# Altium PCB DDS.PcbDoc (part 2 of 2)
Units mm, origin at the board's own origin, x right, y up, seen from the top; angles counter-clockwise.
Board outline 60 x 140 mm, 4 copper layers (Top Layer, GND, Supply, Bottom Layer), stack 0.778 mm thick; 241 components, 138 nets, 781 pads, 160 vias.
Unrouted connection lines stored in the file: 258.
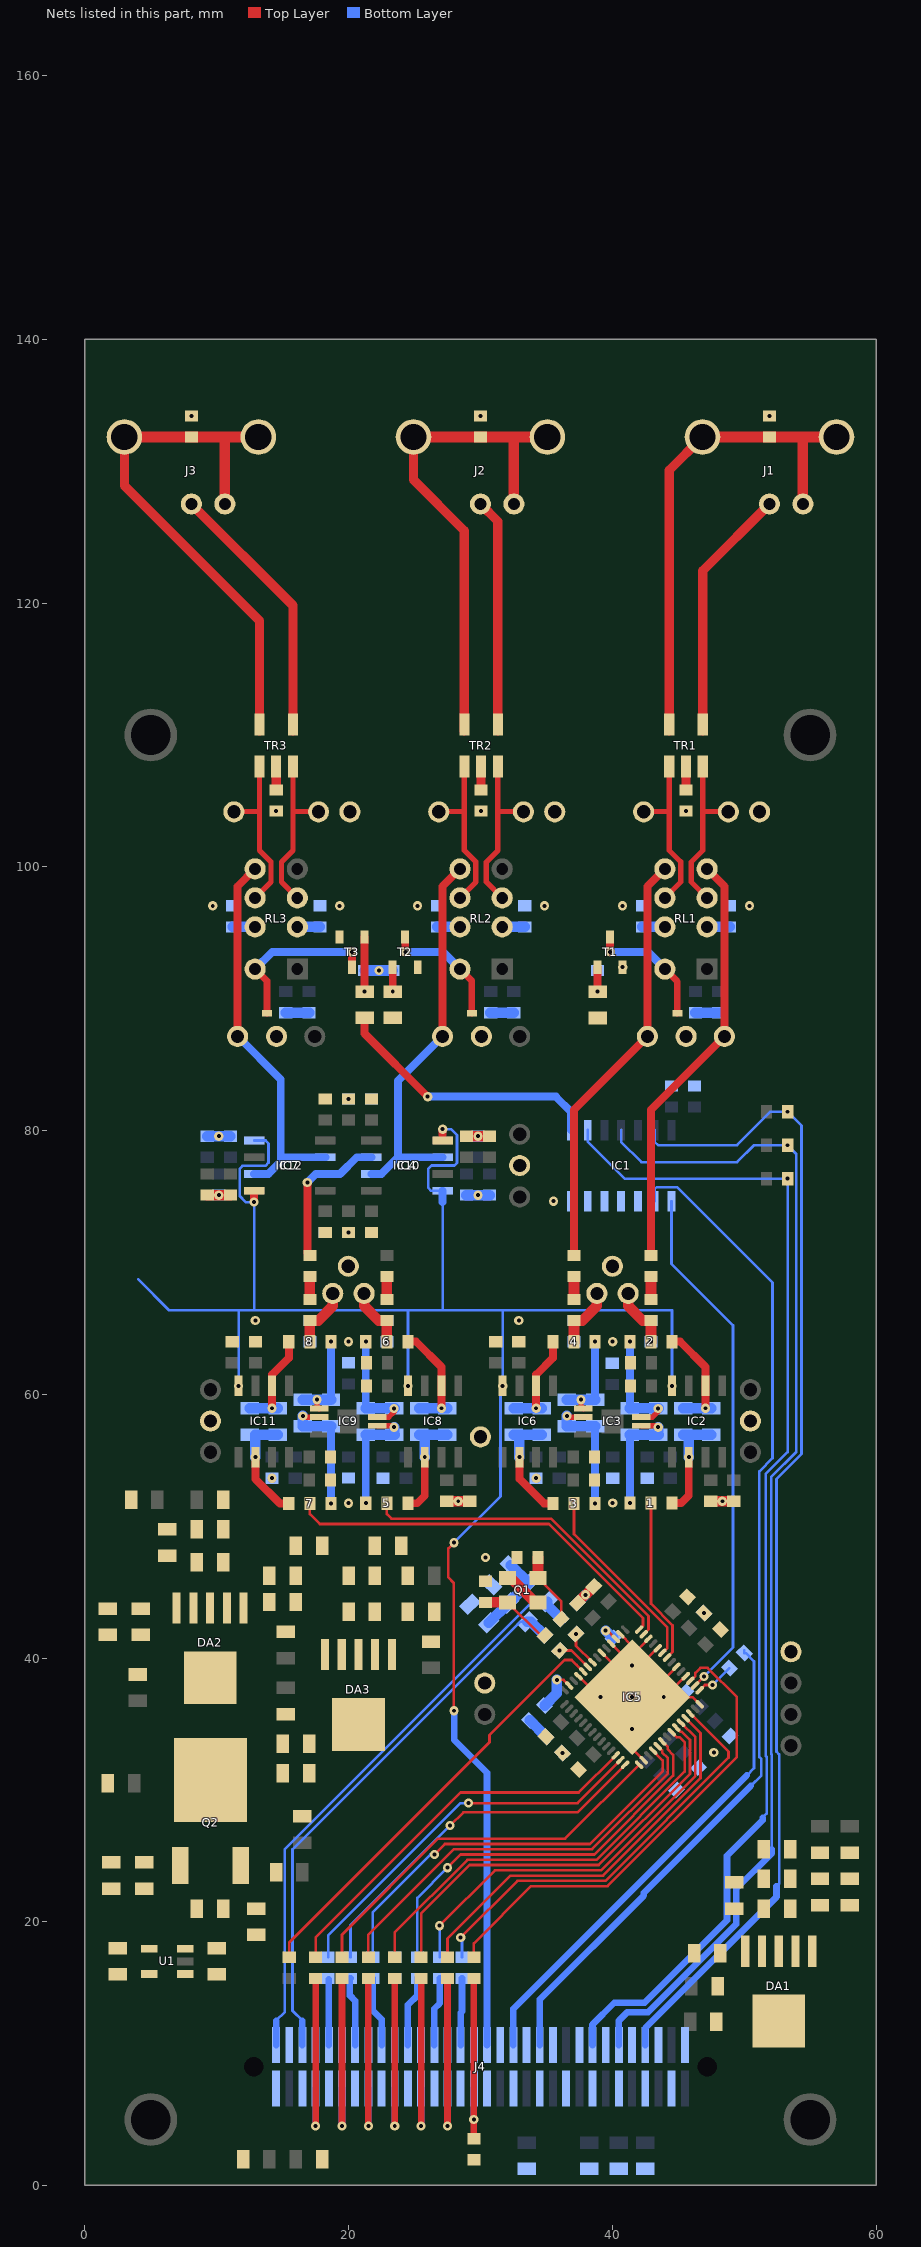
[diagram p4: the nets of this part, all layers, seen from the top]

## Via types
v1: diameter 0.7, hole 0.3, Top Layer to Bottom Layer, 91 vias
v2: diameter 0.7, hole 0.3, Top Layer to Bottom Layer, tented both sides, 63 vias
v3: diameter 1.27, hole 0.711, Top Layer to Bottom Layer, 5 vias
v4: diameter 1, hole 0.5, Top Layer to Bottom Layer, 1 vias

## Nets (pads, with @x,y where several pads share a name; then routed paths per layer and width w, separated by ;. In a path a pad name is that pad's centre, name@x,y a point inside that pad or via, vN(x,y) a via of type N, cw(c..) or ccw(c..) an arc to the next point about the centre after c; other vN are vias at no path point) (continued)
GND: C1.2 C2.2 C3.2 C4.2 C5.2 C6.2 C7.2 C8.2 C9.2 C10.2 C11.2 C12.2 C13.2 C14.2 C15.2 C16.2 C17.2 C18.2 C19.2 C20.2 C21.2 C22.2 C23.2 C24.2 C25.2 C26.2 C27.2 C28.2 C29.2 C30.2 C31.2 C32.1 C33.1 C34.1 C35.1 C36.1 C37.1 C38.1 C39.1 C40.1 C41.1 C42.1 C43.1 C44.1 C45.1 C46.1 C47.1 C48.1 C49.1 C50.1 C51.1 C52.1 C53.1 C54.1 C55.1 C56.1 C57.1 C58.1 C59.1 C60.1 C61.1 C62.1 C63.1 C64.1 C65.1 C69.1 C71.2 C78.1 C80.2 C83.2 C84.2 C86.2 C88.1 C89.1 C90.1 C91.1 C92.1 C93.1 C94.1 C95.1 C96.1 C97.1 C98.1 C99.1 C100.1 C101.1 C103.1 C104.1 C105.1 C106.1 C107.1 C108.1 C110.1 C111.1 C112.1 C113.1 C114.1 C115.1 C117.1 C118.1 DA1.3 DA1.6 DA2.3 DA2.6 DA3.3 DA3.6 IC1.7 IC5.4 IC5.6 IC5.10 IC5.12 IC5.16 IC5.18 IC5.20 IC5.25 IC5.44 IC5.56 IC5.57 J4.1 J4.4 J4.5 J4.8 J4.9 J4.12 J4.13 J4.16 J4.17 J4.20 J4.21 J4.24 J4.25 J4.28 J4.29 J4.32 J4.33 J4.36 J4.37 J4.40 J4.41 J4.44 J4.45 J4.48 J4.49 J4.52 J4.53 J4.56 J4.57 J4.60 J4.61 J4.64 pad.@9.525,57.975 pad.@14.536,87.147 pad.@19.979,69.711 pad.@20.097,104.175 pad.@30,56.775 pad.@30.075,87.147 pad.@30.325,38.1 pad.@32.975,77.35 pad.@35.636,104.175 pad.@40.009,69.711 pad.@45.6,87.147 pad.@50.475,57.975 pad.@51.175,104.175 pad.@53.55,40.475 Q1.2 Q1.4 R3.2 R4.1 R7.1 R9.1 R10.1 R12.1 R25.1 R30.1 R31.1 R35.1 R36.2 R41.1 R42.1 R43.1 R44.1 R45.1 R47.1 R48.1 R49.1 R60.1 R61.1 R62.1 R64.2 R67.1 R69.1 R71.1 R73.1 T1.2 T2.2 T3.2 U1.1 | length 59.6
  Top Layer w0.2: IC5.25@37.434,38.623 39.025,37.032 v1(41.5,37.032) ; IC5.20@39.202,40.391 IC5.57@41.5,38.093 ; IC5.18@39.909,41.098 IC5.57@41.5,39.507 ; IC5.16@40.616,41.805 41.5,40.921 IC5.57@41.5,40.214 ; IC5.44@42.384,32.259 41.5,33.143 v1(41.5,37.032) ; IC5.12@42.737,41.451 IC5.57@41.5,40.214 ; IC5.10@43.445,40.744 IC5.57@41.5,38.8 ; IC5.6@44.859,39.33 IC5.57@42.561,37.032 ; IC5.4@45.566,38.623 43.98,37.037 v1(43.9,37.037) ; IC5.56@46.627,36.502 46.091,37.037 v1(43.9,37.037) ; v1(41.5,37.032) IC5.57@41.5,38.093 ; v1(41.5,37.032) IC5.57@42.561,37.032 ; IC5.57@41.5,38.093 IC5.57@41.5,38.8 ; IC5.57@41.5,38.8 IC5.57@41.5,39.507 ; IC5.57@41.5,39.507 IC5.57@41.5,40.214 ; IC5.57@42.561,37.032 42.566,37.037 v1(43.9,37.037)
  Top Layer w0.8: C41.1@9.285,75.105 v1(10.16,75.105) C25.2@11.035,75.105 ; C38.1@27.44,51.89 C22.2@29.19,51.89 ; C40.1@28.935,79.575 v1(29.81,79.575) C24.2@30.685,79.575 ; Q1.4@32.065,46.072 32.29,46.072 34.14,44.222 Q1.2@34.365,44.222 ; C2.2@37.356,44.181 C1.2@38.593,45.418 ; C36.1@47.465,51.89 C20.2@49.215,51.89
  Bottom Layer w0.8: C43.1@9.285,79.575 v2(10.16,79.575) C27.2@11.035,79.575 ; C56.1@15.236,88.94 15.246,88.95 17.001,88.95 C14.2@17.011,88.94 ; R62.1@21.211,92.14 v2(22.3,92.14) R61.1@23.35,92.14 ; C42.1@28.935,75.105 v2(29.81,75.105) C26.2@30.685,75.105 ; C55.1@30.76,88.93 30.77,88.94 C13.2@32.525,88.94 C13.2@32.535,88.93 ; C48.1@37.356,44.181 v2(37.969,44.793) ; C54.1@46.299,88.93 46.309,88.94 C12.2@48.064,88.94 C12.2@48.074,88.93
  other v1: 36.206,32.793 41.505,34.632 39.1,37.027 41.495,39.432 46.954,43.406 14.2,53.64 34.225,53.64 19.985,72.28 19.985,82.4 40.789,92.39 14.511,104.24 30.05,104.24 45.589,104.24 8.08,134.2 30,134.2 51.92,134.2
  other v2: 47.7,32.825 30.389,47.623 20,51.74 40.03,51.753 28.315,51.89 48.34,51.89 20,63.99 40.03,63.99 12.93,65.59 32.91,65.59 35.55,74.65 9.697,97.05 19.325,97.05 25.236,97.05 34.864,97.05 40.775,97.05 50.403,97.05
I/O_UPDATE: J4.18 R15.1 R41.2 | length 5.3
  Bottom Layer w0.5: R15.1@21.833,15.7 21.833,13.267 22.5,12.6 J4.18@22.5,10.65
IN0+_D: 1.3 C73.1 IC3.6 R20.1 | length 9.2
  Top Layer w0.4: IC3.6@42.21,57.615 43.375,57.615 v1(43.483,57.508)
  Bottom Layer w0.6: v1(41.334,51.753) C73.1@41.334,56.93
  Bottom Layer w0.8: C73.1@41.334,56.943 43.473,56.943 R20.1@43.48,56.95 ; R20.1@43.483,56.95 v1(43.483,57.508) ; R20.1@43.508,56.94 R20.1@43.518,56.93
IN0+_S: 1.1 C66.1 IC2.2 R1.1 | length 8.3
  Top Layer w0.6: 1.1@44.534,51.753 45.23,51.753 45.8,52.323 v1(45.8,55.24) ; IC2.2@45.795,55.243 IC2.2@45.805,55.253
  Bottom Layer w0.8: C66.1@45.365,56.943 R1.1@47.504,56.943 ; v1(45.8,55.24) C66.1@45.8,56.938
IN0-_D: 3.3 C67.1 IC3.2 R2.1 | length 10.1
  Top Layer w0.4: v1(36.557,58.365) 36.657,58.265 IC3.2@37.815,58.265
  Bottom Layer w0.6: v1(38.696,51.715) R2.1@38.696,57.58
  Bottom Layer w0.8: v1(36.557,58.365) 36.557,57.593 R2.1@38.693,57.593
IN0-_S: 3.1 C72.1 IC6.2 R19.1 | length 8.8
  Top Layer w0.6: v1(32.955,55.24) 32.955,53.59 34.83,51.715 3.1@35.496,51.715
  Bottom Layer w0.8: C72.1@32.517,56.943 R19.1@34.656,56.943 ; v1(32.955,55.24) C72.1@32.955,56.938
IN1+_D: 5.3 C82.1 IC9.6 R51.1 | length 9.2
  Top Layer w0.4: IC9.6@22.185,57.615 23.345,57.615 v1(23.453,57.508)
  Bottom Layer w0.6: v1(21.304,51.74) C82.1@21.304,56.93
  Bottom Layer w0.8: C82.1@21.304,56.943 23.443,56.943 R51.1@23.45,56.95 ; R51.1@23.453,56.95 v1(23.453,57.508) ; R51.1@23.478,56.94 R51.1@23.488,56.93
IN1+_S: 5.1 C74.1 IC8.2 R32.1 | length 8.3
  Top Layer w0.6: 5.1@24.504,51.74 25.2,51.74 25.775,52.315 v1(25.775,55.24) IC8.2@25.765,55.23
  Bottom Layer w0.8: C74.1@25.342,56.943 R32.1@27.481,56.943 ; v1(25.775,55.24) C74.1@25.775,56.938
IN1-_D: 7.3 C75.1 IC9.2 R33.1 | length 10.1
  Top Layer w0.4: v1(16.527,58.365) 16.627,58.265 IC9.2@17.785,58.265
  Bottom Layer w0.6: v1(18.666,51.715) R33.1@18.666,57.59
  Bottom Layer w0.8: v1(16.527,58.365) 16.527,57.593 R33.1@18.666,57.593
IN1-_S: 7.1 C81.1 IC11.2 R50.1 | length 8.4
  Top Layer w0.6: v1(12.93,55.24) 12.93,53.585 14.8,51.715 7.1@15.466,51.715
  Bottom Layer w0.2: C81.1@12.925,56.943 C81.1@12.93,56.938
  Bottom Layer w0.8: C81.1@12.925,56.943 R50.1@14.626,56.943 ; v1(12.93,55.24) C81.1@12.93,56.938
MASTER_RST: J4.31 R14.1 R42.2 | length 14.5
  Top Layer w0.5: R42.2@29.5,3.55 v1(29.5,5) R14.1@29.5,15.7
  Bottom Layer w0.5: v1(29.5,5) J4.31@29.5,7.35
Net1_2: 1.2 IC5.8 | length 12.6
  Top Layer w0.2: 1.2@42.934,51.753 42.934,44.119 44.57,42.483 44.57,40.456 IC5.8@44.152,40.037
Net2_2: 2.2 pad.@41.205,67.65 R3.1 R5.1 | length 4.7
  Top Layer w0.8: pad.@41.205,67.65 41.205,66.7 42.315,65.59 R5.1@42.934,65.59 v1(42.934,63.99)
Net3_2: 3.2 IC5.9 | length 14.4
  Top Layer w0.2: 3.2@37.096,51.715 37.096,49.391 44.17,42.317 44.17,40.763 IC5.9@43.798,40.391
Net4_2: 4.2 pad.@38.83,67.65 R8.1 R12.2 | length 4.7
  Top Layer w0.8: v1(37.096,63.99) R8.1@37.096,65.59 37.72,65.59 38.83,66.7 pad.@38.83,67.65
Net5_2: 5.2 IC5.13 | length 25.5
  Top Layer w0.2: 5.2@22.904,51.74 22.904,50.911 23.25,50.565 35.356,50.565 42.75,43.171 42.75,42.171 IC5.13@42.384,41.805 IC5.13@42.384,41.876
Net6_2: 6.2 pad.@21.175,67.65 R36.1 R37.1 | length 4.7
  Top Layer w0.8: pad.@21.175,67.65 21.175,66.7 22.285,65.59 R37.1@22.904,65.59 v1(22.904,63.99)
Net7_2: 7.2 IC5.14 | length 30.3
  Top Layer w0.2: 7.2@17.066,51.715 17.066,50.924 17.825,50.165 35.191,50.165 42.325,43.031 42.325,42.453 IC5.14@42.03,42.159
Net8_2: 8.2 pad.@18.8,67.65 R40.1 R45.2 | length 4.7
  Top Layer w0.8: v1(17.066,63.99) R40.1@17.066,65.59 17.69,65.59 18.8,66.7 pad.@18.8,67.65
NetC68_1: C68.1 R5.2 | length 1.7
  Top Layer w0.8: R5.2@42.934,67.19 C68.1@42.934,68.93
NetC68_2: C68.2 pad.@48.5,87.147 RL1.4 | length 32.2
  Top Layer w0.6: C68.2@42.934,70.53 42.934,81.581 pad.@48.5,87.147 48.514,87.161 48.514,98.525 RL1.4@47.189,99.85
NetC70_1: C70.1 R8.2 | length 1.7
  Top Layer w0.8: R8.2@37.096,67.19 C70.1@37.096,68.93
NetC70_2: C70.2 pad.@42.664,87.147 RL1.5 | length 32.2
  Top Layer w0.6: C70.2@37.096,70.53 37.096,81.579 pad.@42.664,87.147 42.664,98.525 RL1.5@43.989,99.85
NetC76_1: C76.1 R37.2 | length 1.7
  Top Layer w0.8: R37.2@22.904,67.19 C76.1@22.904,68.93
NetC77_1: C77.1 R40.2 | length 1.7
  Top Layer w0.8: R40.2@17.066,67.19 C77.1@17.066,68.93
NetC79_2: C79.2 R38.1 | length 1.7
  Bottom Layer w0.8: R38.1@33.732,35.267 C79.2@34.969,34.031
NetC83_1: C83.1 Q1.3 R52.2 | length 5.4
  Top Layer w0.2: Q1.3@34.365,46.072 36.119,44.318 R52.2@36.119,42.943
  Top Layer w0.8: Q1.3@34.365,46.072 C83.1@34.365,47.623
NetC84_1: C84.1 Q1.1 R53.2 | length 5.5
  Top Layer w0.2: Q1.1@32.065,44.222 34.581,41.706 R53.2@34.881,41.706
  Top Layer w0.8: C84.1@30.389,44.222 Q1.1@32.065,44.222
NetC86_1: C86.1 R63.1 R64.1 R65.2 | length 6.2
  Bottom Layer w0.2: R64.1@30.625,42.675 R64.1@30.635,42.675
  Bottom Layer w0.8: R64.1@30.635,42.675 R65.2@32.136,44.176 R63.1@33.648,45.689 C86.1@32.306,47.031
NetC93_2: C93.2 C94.2 L1.2 Q2.3 U1.3
NetC95_2: C95.2 C96.2 Q2.1 U1.5
NetC100_2: C100.2 C101.2 DA1.1 DA1.5 L3.2
NetC102_1: C102.1 DA1.4 R68.1 R69.2
NetC102_2: C102.2 C103.2 C104.2 DA1.2 L4.1 R68.2
NetC107_2: C107.2 C108.2 DA2.1 DA2.5 L5.2
NetC109_1: C109.1 DA2.4 R70.1 R71.2
NetC109_2: C109.2 C110.2 C111.2 DA2.2 L6.1 R70.2
NetC114_2: C114.2 C115.2 DA3.1 DA3.5 L7.2
NetC116_1: C116.1 DA3.4 R72.1 R73.2
NetC116_2: C116.2 C117.2 C118.2 DA3.2 L8.1 R72.2
NetD1_2: D1.2 RL1.8 T1.3 | length 9.6
  Top Layer w0.5: RL1.8@43.989,92.25 44.939,91.3 D1.2@44.939,88.89
  Top Layer w0.6: v2(39.839,93.54) T1.3@39.839,94.69
  Bottom Layer w0.5: RL1.8@44.029,92.25 RL1.8@44.049,92.25
  Bottom Layer w0.6: v2(39.839,93.54) 42.699,93.54 RL1.8@43.989,92.25
NetD2_2: D2.2 RL2.8 T2.3 | length 9.6
  Top Layer w0.5: RL2.8@28.45,92.25 29.35,91.35 D2.2@29.35,88.89
  Top Layer w0.6: v2(24.3,93.54) T2.3@24.3,94.69
  Bottom Layer w0.6: v2(24.3,93.54) 27.16,93.54 RL2.8@28.45,92.25
NetD3_2: D3.2 RL3.8 T3.3 | length 12.8
  Top Layer w0.5: RL3.8@12.911,92.25 13.811,91.35 D3.2@13.811,88.89
  Top Layer w0.6: T3.3@20.261,92.39 v2(20.261,93.54)
  Bottom Layer w0.6: RL3.8@12.911,92.25 14.211,93.55 17.118,93.55 17.128,93.54 v2(20.261,93.54)
NetIC1_4: IC1.4 R57.1
NetIC1_6: IC1.6 R58.1
NetIC1_8: IC1.8 R59.1 | length 20.7
  Top Layer w0.6: R59.1@21.211,88.54 21.211,87.364 v2(26,82.575)
  Bottom Layer w0.6: v2(26,82.575) 35.715,82.575 36.865,81.425 IC1.8@36.865,80.04
NetIC5_1: IC5.1 R11.2 | length 2.9
  Top Layer w0.2: IC5.1@46.627,37.562 47.02,37.956 47.595,37.956 v2(47.602,37.963)
  Bottom Layer w0.2: v2(47.602,37.963) R11.2@48.875,39.237
NetIC5_3: IC5.3 R14.2 | length 36.4
  Top Layer w0.2: R14.2@29.5,17.3 29.5,18.366 33.834,22.7 39.652,22.7 49.45,32.498 49.45,37.035 47.229,39.256 46.677,39.256 46.296,38.875 46.296,38.646 IC5.3@45.919,38.269
NetIC5_17: IC5.17 R43.2 | length 1.9
  Top Layer w0.2: v2(39.5,42.077) 39.625,42.077 40.251,41.451 IC5.17@40.263,41.451
  Bottom Layer w0.2: v2@39.55,42.099 v2@39.55,42.164 ; v2@39.575,42.112 v2@39.575,42.127
  Bottom Layer w0.8: v2@39.5,42.062 R43.2@40.059,41.503
NetIC5_24: IC5.24 R34.2 | length 33
  Top Layer w0.2: R34.2@15.5,17.3 15.5,18.428 30.685,33.613 30.685,34.166 36.373,39.853 36.921,39.853 37.301,39.473 37.301,39.463 IC5.24@37.788,38.977
NetIC5_27: IC5.27 R38.2 | length 3.4
  Top Layer w0.2: v2(35.793,38.345) 36.298,38.345 IC5.27@36.727,37.916
  Bottom Layer w0.8: R38.2@34.863,36.399 35.793,37.328 v2(35.793,38.345)
NetIC5_40: IC5.40 R18.1 | length 30
  Top Layer w0.2: R18.1@17.5,17.3 17.5,18.8 28.5,29.8 37.45,29.8 IC5.40@40.263,32.613
NetIC5_41: IC5.41 R22.1 | length 29.3
  Top Layer w0.2: v1(29.1,29) 37.357,29 IC5.41@40.616,32.259
  Bottom Layer w0.2: R22.1@18.45,17.3 18.45,18.969 28.481,29 v1(29.1,29)
NetIC5_42: IC5.42 R24.1 | length 28.3
  Top Layer w0.2: v1(27.7,27.3) 28.7,28.3 37.364,28.3 IC5.42@40.97,31.905
  Bottom Layer w0.2: R24.1@20.142,17.3 20.142,19.742 v1(27.7,27.3)
NetIC5_43: IC5.43 R27.1 | length 29.6
  Top Layer w0.2: R27.1@19.5,17.3 19.5,19.013 26.787,26.3 36.425,26.3 IC5.43@42.03,31.905
NetIC5_46: IC5.46 R15.2 | length 31.7
  Top Layer w0.2: v1(26.506,25.1) 27.306,25.9 38.307,25.9 43.817,31.409 43.817,32.241 IC5.46@43.091,32.966
  Bottom Layer w0.2: R15.2@21.833,17.3 21.833,20.733 26.2,25.1 v1(26.506,25.1)
NetIC5_47: IC5.47 R17.2 | length 31.9
  Top Layer w0.2: R17.2@21.5,17.3 21.5,19.019 27.981,25.5 38.473,25.5 44.217,31.244 44.217,32.406 43.775,32.848 43.775,32.989 IC5.47@43.445,33.32
NetIC5_48: IC5.48 R21.2 | length 30.8
  Top Layer w0.2: v1(27.5,24.1) 28.5,25.1 38.639,25.1 44.617,31.078 44.617,32.659 44.191,33.084 44.191,33.28 IC5.48@43.798,33.673 IC5.48@43.798,33.603
  Bottom Layer w0.2: R21.2@25.217,17.3 25.217,21.817 v1(27.5,24.1)
NetIC5_50: IC5.50 R23.2 | length 32.5
  Top Layer w0.2: R23.2@23.5,17.3 23.5,19.181 29.019,24.7 38.804,24.7 45.491,31.387 45.491,33.623 45.111,34.003 44.882,34.003 IC5.50@44.505,34.38 IC5.50@44.576,34.38
NetIC5_51: IC5.51 R26.2 | length 32.1
  Top Layer w0.2: R26.2@25.5,17.3 25.5,20.615 29.185,24.3 38.97,24.3 45.891,31.221 45.891,33.788 45.276,34.403 45.189,34.403 IC5.51@44.859,34.734
NetIC5_52: IC5.52 R28.2 | length 31
  Top Layer w0.2: v1(26.9,19.7) 31.1,23.9 39.136,23.9 46.291,31.056 46.291,34.008 IC5.52@45.212,35.087 IC5.52@45.177,35.052
  Bottom Layer w0.2: v1(26.9,19.7) 26.908,19.692 R28.2@26.908,17.3
NetIC5_53: IC5.53 R29.2 | length 30.7
  Top Layer w0.2: R29.2@27.5,17.3 27.5,18.719 32.281,23.5 39.301,23.5 46.691,30.89 46.691,34.315 IC5.53@45.566,35.441
NetIC5_54: IC5.54 R16.2 | length 32.1
  Top Layer w0.2: v1(28.5,18.8) 32.8,23.1 39.467,23.1 48.815,32.448 48.815,32.899 IC5.54@45.919,35.795
  Bottom Layer w0.2: v1(28.5,18.8) 28.6,18.8 R16.2@28.6,17.3
NetJ1_1: J1.1 TR1.6 | length 19.3
  Top Layer w0.7: TR1.6@46.859,110.295 46.859,122.459 J1.1@51.92,127.52
NetJ1_2: J1.2 R10.2 TR1.4 | length 38.6
  Top Layer w0.7: TR1.4@44.319,110.295 44.319,130.079 J1.2@46.84,132.6
  Top Layer w0.8: J1.2@46.84,132.6 54.46,132.6 ; J1.2@54.46,127.52 54.46,132.6 ; J1.2@57,132.6 54.46,132.6
NetJ2_1: J2.1 TR2.6 | length 17.8
  Top Layer w0.7: J2.1@30,127.52 31.32,126.2 TR2.6@31.32,110.295
NetJ2_2: J2.2 R35.2 TR2.4 | length 39.1
  Top Layer w0.7: J2.2@24.92,132.6 24.92,129.355 28.78,125.495 TR2.4@28.78,110.295
  Top Layer w0.8: J2.2@24.92,132.6 32.54,132.6 ; J2.2@32.54,127.52 32.54,132.6 ; J2.2@35.08,132.6 32.54,132.6
NetJ3_1: J3.1 TR3.6 | length 20.4
  Top Layer w0.7: J3.1@8.08,127.52 15.781,119.819 TR3.6@15.781,110.295
NetJ3_2: J3.2 R49.2 TR3.4 | length 41.8
  Top Layer w0.7: J3.2@3,132.6 3,128.9 13.241,118.659 TR3.4@13.241,110.295
  Top Layer w0.8: J3.2@3,132.6 10.62,132.6 ; J3.2@10.62,127.52 10.62,132.6 ; J3.2@13.16,132.6 10.62,132.6
NetL2_1: L2.1 Q2.2 R66.2
NetR4_2: R4.2 RL1.2 | length 1.7
  Bottom Layer w0.8: RL1.2@47.189,95.45 R4.2@48.899,95.45
NetR7_2: R7.2 TR1.2 | length 1.8
  Top Layer w0.7: R7.2@45.589,105.84 TR1.2@45.589,107.615
NetR9_2: R9.2 RL1.7 | length 1.7
  Bottom Layer w0.8: R9.2@42.279,95.45 RL1.7@43.989,95.45
NetR25_2: R25.2 RL2.2 | length 1.7
  Bottom Layer w0.8: RL2.2@31.65,95.45 R25.2@33.36,95.45
NetR30_2: R30.2 TR2.2 | length 1.8
  Top Layer w0.7: R30.2@30.05,105.84 TR2.2@30.05,107.615
NetR31_2: R31.2 RL2.7 | length 1.7
  Bottom Layer w0.8: R31.2@26.74,95.45 RL2.7@28.45,95.45
NetR44_2: R44.2 RL3.2 | length 1.7
  Bottom Layer w0.8: RL3.2@16.111,95.45 R44.2@17.821,95.45
NetR47_2: R47.2 TR3.2 | length 1.8
  Top Layer w0.7: R47.2@14.511,105.84 TR3.2@14.511,107.615
NetR48_2: R48.2 RL3.7 | length 1.7
  Bottom Layer w0.8: R48.2@11.201,95.45 RL3.7@12.911,95.45
NetR57_2: R57.2 R60.2 T1.1 | length 1.9
  Top Layer w0.6: v1(38.889,90.54) T1.1@38.889,92.39
NetR58_2: R58.2 R61.2 T2.1 | length 1.8
  Top Layer w0.6: v1(23.35,90.54) T2.1@23.35,92.39
NetR59_2: R59.2 R62.2 T3.1 | length 4.2
  Top Layer w0.6: v1(21.211,90.54) T3.1@21.211,94.69
NetR66_1: R66.1 R67.2 U1.4
NetRL1_3: pad.@48.8,104.175 RL1.3 TR1.1 | length 12.8
  Top Layer w0.4: 46.859,104.2 pad.@48.8,104.175 ; TR1.1@46.859,107.615 46.859,101.246 45.989,100.376 45.989,98.85 RL1.3@47.189,97.65
NetRL1_6: pad.@42.378,104.175 RL1.6 TR1.3 | length 12.8
  Top Layer w0.4: pad.@42.378,104.175 44.319,104.2 ; RL1.6@43.989,97.65 45.189,98.85 45.189,100.379 44.319,101.249 TR1.3@44.319,107.615
NetRL2_3: pad.@33.261,104.175 RL2.3 TR2.1 | length 12.8
  Top Layer w0.4: 31.32,104.2 pad.@33.261,104.175 ; TR2.1@31.32,107.615 31.32,101.246 30.45,100.376 30.45,98.85 RL2.3@31.65,97.65
NetRL2_6: pad.@26.839,104.175 RL2.6 TR2.3 | length 12.8
  Top Layer w0.4: pad.@26.839,104.175 28.78,104.2 ; RL2.6@28.45,97.65 29.65,98.85 29.65,100.379 28.78,101.249 TR2.3@28.78,107.615
NetRL3_3: pad.@17.722,104.175 RL3.3 TR3.1 | length 12.8
  Top Layer w0.4: 15.781,104.2 pad.@17.722,104.175 ; TR3.1@15.781,107.615 15.781,101.246 14.911,100.376 14.911,98.85 RL3.3@16.111,97.65
NetRL3_6: pad.@11.3,104.175 RL3.6 TR3.3 | length 12.8
  Top Layer w0.4: pad.@11.3,104.175 13.241,104.2 ; RL3.6@12.911,97.65 14.111,98.85 14.111,100.379 13.241,101.249 TR3.3@13.241,107.615
OUT0+_D: 2.3 C73.2 IC3.7 R20.2 | length 8.9
  Top Layer w0.4: IC3.7@42.215,58.265 43.051,58.265 43.483,58.697 v1(43.483,58.93)
  Bottom Layer w0.6: C73.2@41.334,58.94 v1(41.334,63.99)
  Bottom Layer w0.8: C73.2@41.334,58.94 43.463,58.94 R20.2@43.473,58.93 ; R20.2@43.508,58.94 R20.2@43.518,58.93
OUT0+_S: 2.1 C66.2 IC2.6 R1.2 | length 8.6
  Top Layer w0.6: 2.1@44.534,63.99 45.15,63.99 47.07,62.07 IC2.6@47.07,60.64 v1(47.07,58.943)
  Bottom Layer w0.8: C66.2@45.365,58.943 v1(47.07,58.943) R1.2@47.504,58.943
OUT0-_D: 4.3 C67.2 IC3.1 R2.2 | length 7.3
  Top Layer w0.4: v2(37.625,59.59) 37.625,59.1 IC3.1@37.81,58.915
  Bottom Layer w0.6: R2.2@38.696,59.58 v1(38.696,63.99)
  Bottom Layer w0.8: C67.2@36.552,59.58 36.562,59.59 C67.2@36.577,59.59 ; C67.2@36.557,59.58 36.567,59.58 C67.2@36.577,59.59 ; R2.2@38.691,59.59 37.43,59.59 C67.2@36.577,59.59
OUT0-_S: 4.1 C72.2 IC6.6 R19.2 | length 7.7
  Top Layer w0.6: v1(34.225,58.942) IC6.6@34.225,60.64 34.225,61.49 35.491,62.756 4.1@35.491,63.99
  Bottom Layer w0.8: C72.2@32.517,58.943 R19.2@34.656,58.943
OUT1+_D: 6.3 C82.2 IC9.7 R51.2 | length 8.9
  Top Layer w0.4: IC9.7@22.185,58.265 23.05,58.265 23.453,58.668 v1(23.453,58.93)
  Bottom Layer w0.2: C82.2@21.304,58.93 C82.2@21.304,58.94
  Bottom Layer w0.6: C82.2@21.304,58.94 v1(21.304,63.99)
  Bottom Layer w0.8: C82.2@21.304,58.94 23.433,58.94 R51.2@23.443,58.93 ; R51.2@23.478,58.94 R51.2@23.488,58.93
OUT1+_S: 6.1 C74.2 IC8.6 R32.2 | length 8.6
  Top Layer w0.6: 6.1@24.509,63.99 25.125,63.99 27.045,62.07 IC8.6@27.045,60.64 v1(27.045,58.943)
  Bottom Layer w0.8: C74.2@25.342,58.943 v1(27.045,58.943) R32.2@27.481,58.943
OUT1-_D: 8.3 C75.2 IC9.1 R33.2 | length 7.3
  Top Layer w0.4: v2(17.6,59.59) 17.6,59.1 IC9.1@17.785,58.915
  Bottom Layer w0.6: R33.2@18.666,59.59 v1(18.666,63.99)
  Bottom Layer w0.8: C75.2@16.527,59.58 16.537,59.59 v2(17.6,59.59) R33.2@18.666,59.59
OUT1-_S: 8.1 C81.2 IC11.6 R50.2 | length 7.7
  Top Layer w0.6: v1(14.2,58.942) IC11.6@14.2,60.64 14.2,61.49 15.466,62.756 8.1@15.466,63.99
  Bottom Layer w0.8: C81.2@12.487,58.943 v1(14.2,58.942) R50.2@14.626,58.943
P0: J4.7 R18.2 | length 14
  Top Layer w0.5: v1(17.5,4.5) R18.2@17.5,15.7
  Bottom Layer w0.5: v1(17.5,4.5) J4.7@17.5,7.35
P1: J4.10 R22.2 | length 5
  Bottom Layer w0.5: J4.10@18.5,10.65 R22.2@18.5,15.65
P2: J4.14 R24.2 | length 5.2
  Bottom Layer w0.5: R24.2@20.142,15.7 20.1,15.658 20.1,14.4 20.5,14 J4.14@20.5,10.65
P3: J4.11 R27.2 | length 14
  Top Layer w0.5: v1(19.5,4.5) R27.2@19.5,15.7
  Bottom Layer w0.5: v1(19.5,4.5) J4.11@19.5,7.35
REF_CLK: C87.2 J4.6 R65.1 | length 41.9
  Bottom Layer w0.2: 16.5,12.5 15.75,13.25 15.75,25.487 33.025,42.762 R65.1@33.55,42.762
  Bottom Layer w0.5: J4.6@16.5,10.65 16.5,12.5
  Bottom Layer w0.8: R65.1@33.55,42.762 33.825,42.762 C87.2@34.881,41.706
REF_CLK_DDS: C87.1 IC5.23 R53.1 | length 2.6
  Top Layer w0.2: v1(36.013,40.575) 36.897,40.575 IC5.23@38.141,39.33
RL_CH0: IC1.3 J4.58 R54.1 | length 88.4
  Bottom Layer w0.2: 43.215,80.04 43.215,79.15 43.475,78.89 49.465,78.89 52.005,81.43 v1(53.3,81.43) 54.35,80.38 54.35,55.476 52.45,53.576 52.45,32.894 52.65,32.694 52.65,22.9 52.45,22.7
  Bottom Layer w0.5: J4.58@42.5,10.65 42.5,11.936 43.014,12.45 43.02,12.45 52.45,21.88 52.45,22.7
RL_CH1: IC1.5 J4.54 R55.1 | length 89.7
  Bottom Layer w0.2: 40.675,80.04 40.675,79.14 42.215,77.6 49.475,77.6 50.765,78.89 v1(53.3,78.89) 53.95,78.24 53.95,55.642 52.05,53.742 52.05,32.729 52.1,32.679 52.1,25.5
  Bottom Layer w0.5: J4.54@40.5,10.65 40.5,12.5 41.15,13.15 42.73,13.15 49.4,19.82 49.4,22.5 52.1,25.2 52.1,25.5
RL_~CH1: IC1.9 J4.50 R56.1 | length 90.4
  Bottom Layer w0.2: IC1.9@38.135,80.04 38.135,79.155 40.94,76.35 v1(53.3,76.35) 53.3,55.628 51.65,53.978 51.65,32.563 51.7,32.513 51.7,28.2 51.4,27.9
  Bottom Layer w0.5: J4.50@38.5,10.65 38.5,12.2 40.15,13.85 42.44,13.85 48.7,20.11 48.7,25 51.4,27.7 51.4,27.9
SCLK: J4.22 R21.1 | length 5.3
  Bottom Layer w0.5: J4.22@24.5,10.65 24.5,13.7 25.217,14.417 R21.1@25.217,15.7
SDIO_0: J4.19 R23.1 | length 14.1
  Top Layer w0.5: v1(23.5,4.5) R23.1@23.5,15.7
  Bottom Layer w0.5: v1(23.5,4.5) J4.19@23.5,7.35
SDIO_1: J4.23 R26.1 | length 14.1
  Top Layer w0.5: v1(25.5,4.5) R26.1@25.5,15.7
  Bottom Layer w0.5: v1(25.5,4.5) J4.23@25.5,7.35
SDIO_2: J4.26 R28.1 | length 5.2
  Bottom Layer w0.5: J4.26@26.5,10.65 26.5,13.4 26.908,13.808 R28.1@26.908,15.7
SDIO_3: J4.27 R29.1 | length 14.1
  Top Layer w0.5: v1(27.5,4.5) R29.1@27.5,15.7
  Bottom Layer w0.5: v1(27.5,4.5) J4.27@27.5,7.35
SYNC_CLK: J4.30 R16.1 | length 5.1
  Bottom Layer w0.5: J4.30@28.5,10.65 28.5,13.1 28.6,13.2 R16.1@28.6,15.7
SYNC_IN: J4.38 R11.1 | length 37.9
  Bottom Layer w0.2: R11.1@50.007,40.572 R11.1@50.007,40.368 50.132,40.368 50.75,39.75 50.75,31.65 50.2,31.1
  Bottom Layer w0.5: J4.38@32.5,10.65 32.5,13.4 50.2,31.1
SYNC_OUT: IC1.2 J4.42 | length 78.2
  Bottom Layer w0.2: IC1.2@43.215,74.64 43.215,75.555 43.375,75.715 44.909,75.715 52.15,68.474 52.15,55.154 51.15,54.154 51.15,32.497 51.3,32.347 51.3,31.1 50.5,30.3
  Bottom Layer w0.5: J4.42@34.5,10.65 34.5,14.1 42.4,22 42.4,22.2 50.5,30.3
SYNC_OUT_DDS: IC1.1 IC5.2 | length 39.8
  Top Layer w0.2: IC5.2@46.273,37.916 v2@46.946,38.589
  Bottom Layer w0.2: IC1.1@44.485,74.64 44.485,69.89 49.15,65.225 49.15,40.809 v2(46.946,38.606)
~CH1: C77.2 IC10.3 IC12.3 | length 11.3
  Top Layer w0.6: v2(16.87,76.065) 16.87,70.726 C77.2@17.066,70.53
  Bottom Layer w0.6: v2(16.87,76.065) 17.51,76.705 IC12.3@18.235,76.705 19.35,76.705 20.62,77.975 IC10.3@21.735,77.975
~CH1_1: IC10.2 IC10.6 pad.@27.125,87.147 RL2.5 | length 29.7
  Top Layer w0.6: pad.@27.125,87.147 27.125,98.525 RL2.5@28.45,99.85
  Bottom Layer w0.6: IC10.2@21.735,76.705 22.485,76.705 23.755,77.975 ; pad.@27.125,87.147 23.755,83.777 23.755,77.975 ; IC10.6@27.135,77.975 23.755,77.975
~CH1_2: IC12.2 IC12.6 pad.@11.586,87.147 RL3.5 | length 29.9
  Top Layer w0.6: pad.@11.586,87.147 11.586,98.525 RL3.5@12.911,99.85
  Bottom Layer w0.6: pad.@11.586,87.147 14.855,83.878 14.855,77.975 ; IC12.6@12.835,76.705 13.913,76.705 14.855,77.647 14.855,77.975 ; IC12.2@18.235,77.975 14.855,77.975
~CS: J4.15 R17.1 | length 14.1
  Top Layer w0.5: v1(21.5,4.5) R17.1@21.5,15.7
  Bottom Layer w0.5: v1(21.5,4.5) J4.15@21.5,7.35
~DIS: IC2.8 IC4.8 IC6.8 IC7.8 IC8.8 IC10.8 IC11.8 IC12.8 J4.34 | length 153
  Top Layer w0.2: v1(28,36) 27.975,36.025 27.975,45.703 27.565,46.113 27.565,48.315 v1(28,48.75)
  Top Layer w0.6: v2(12.835,74.575) IC7.8@12.835,75.435 ; IC4.8@27.135,79.245 v2(27.135,80.105)
  Bottom Layer w0.2: 4.04,68.73 6.395,66.375 11.66,66.375 ; v1(11.66,60.64) 11.66,66.375 ; IC12.8@12.835,79.245 13.705,79.245 13.925,79.025 13.925,77.566 13.684,77.325 11.956,77.325 11.75,77.119 11.75,75.021 12.196,74.575 v2(12.835,74.575) 12.835,66.385 12.825,66.375 ; v1(24.505,60.64) 24.505,66.375 ; 27.135,74.575 27.135,66.385 27.125,66.375 ; IC10.8@27.135,75.435 26.265,75.435 26.045,75.655 26.045,77.114 26.286,77.355 28.014,77.355 28.22,77.561 28.22,79.659 27.774,80.105 v2(27.135,80.105) ; v1(28,48.75) 31.517,52.267 31.517,60.472 v1(31.685,60.64) 31.685,66.375 ; v1(44.53,60.64) 44.53,66.375 31.685,66.375 ; 11.66,66.375 12.825,66.375 ; 12.825,66.375 24.505,66.375 ; 24.505,66.375 27.125,66.375 ; 27.125,66.375 31.685,66.375
  Bottom Layer w0.5: v1(28,36) 28,33.8 30.5,31.3 J4.34@30.5,10.65
  Bottom Layer w0.6: 27.135,74.575 IC10.8@27.135,75.435
~REF_CLK: C85.2 J4.2 R63.2 | length 44.6
  Bottom Layer w0.2: 14.5,12.5 15.165,13.165 15.165,25.502 33.688,44.025 34.813,44.025 R63.2@35.063,44.275
  Bottom Layer w0.5: J4.2@14.5,10.65 14.5,12.5
  Bottom Layer w0.8: R63.2@35.063,44.275 35.063,43.999 C85.2@36.119,42.943
~REF_CLK_DDS: C85.1 IC5.22 R52.1 | length 2.6
  Top Layer w0.2: v1(37.25,41.812) 37.25,40.928 IC5.22@38.495,39.684
pads on no net: IC1.10 IC1.11 IC1.12 IC1.13 IC2.1 IC2.5 IC4.1 IC4.5 IC5.28 IC5.32 IC5.34 IC5.38 IC6.1 IC6.5 IC7.1 IC7.5 IC8.1 IC8.5 IC10.1 IC10.5 IC11.1 IC11.5 IC12.1 IC12.5 J4.43 J4.46 J4.59 J4.62 J4.63 J4.65 J4.66 U1.2
copper on no net: | length 30.4
  Top Layer w0.6: 23.35,88.54 23.35,87.347 v2(26,84.697) ; v2(38.889,84.697) 38.889,88.04
  Bottom Layer w0.6: v2(26,84.697) 36.143,84.697 39.405,81.435 39.405,80.04 ; v2(38.889,84.697) 41.945,81.641 41.945,80.04
  other v4: 12.8,6

## Polygon pours and split planes (outlines as drawn)
GND on Top Layer "Top Layer-GND" (solid, pour order 0): 59.5,139.5 0.5,139.5 0.5,0.5 59.5,0.5
GND on Bottom Layer "Bottom Layer-GND" (solid, pour order 2): 59.546,0.521 0.546,0.521 0.546,139.521 59.546,139.521
GND on GND (split plane): 59.49,0.51 0.51,0.51 0.51,139.49 59.49,139.49
GND on Supply (split plane): 59.49,60.077 51.625,60.077 51.573,60.07 51.524,60.05 51.482,60.018 51.45,59.976 51.43,59.927 51.423,59.875 51.423,59.352 8.552,59.352 8.552,59.875 8.545,59.927 8.525,59.976 8.493,60.018 8.451,60.05 8.402,60.07 8.35,60.077 0.51,60.077 0.51,64.703 59.49,64.703
GND on Supply (split plane): 59.49,0.51 0.51,0.51 0.51,49.498 59.49,49.498
GND on Supply (split plane): 59.49,90.577 0.51,90.577 0.51,95.248 36.325,95.248 36.377,95.255 36.426,95.275 36.468,95.307 36.5,95.349 36.52,95.398 36.527,95.45 36.52,95.502 36.5,95.551 36.468,95.593 36.426,95.625 36.377,95.645 36.325,95.652 0.51,95.652 0.51,139.49 59.49,139.49
GND on Supply (split plane): 59.49,82.927 44.5,82.927 44.448,82.92 44.399,82.9 44.357,82.868 44.325,82.826 44.305,82.777 44.298,82.725 44.298,72.55 44.305,72.498 44.325,72.449 44.357,72.407 44.399,72.375 44.448,72.355 44.5,72.348 59.49,72.348 59.49,65.107 0.51,65.107 0.51,72.348 35.9,72.348 35.952,72.355 36.001,72.375 36.043,72.407 36.075,72.449 36.095,72.498 36.102,72.55 36.102,82.75 36.095,82.802 36.075,82.851 36.043,82.893 36.001,82.925 35.952,82.945 35.9,82.952 0.51,82.952 0.51,90.173 59.49,90.173
GND on Supply (split plane): 59.49,54.977 49.2,54.977 49.148,54.97 49.099,54.95 49.057,54.918 49.025,54.876 49.005,54.827 48.998,54.775 48.998,52.952 47.702,52.952 47.702,54.775 47.695,54.827 47.675,54.876 47.643,54.918 47.601,54.95 47.552,54.97 47.5,54.977 29.175,54.977 29.123,54.97 29.074,54.95 29.032,54.918 29,54.876 28.98,54.827 28.973,54.775 28.973,52.852 27.677,52.852 27.677,54.775 27.67,54.827 27.65,54.876 27.618,54.918 27.576,54.95 27.527,54.97 27.475,54.977 0.51,54.977 0.51,59.673 8.148,59.673 8.148,59.15 8.155,59.098 8.175,59.049 8.207,59.007 8.249,58.975 8.298,58.955 8.35,58.948 51.625,58.948 51.677,58.955 51.726,58.975 51.768,59.007 51.8,59.049 51.82,59.098 51.827,59.15 51.827,59.673 59.49,59.673
GND on Supply (split plane): 59.49,49.902 0.51,49.902 0.51,54.573 27.273,54.573 27.273,52.65 27.28,52.598 27.3,52.549 27.332,52.507 27.374,52.475 27.423,52.455 27.475,52.448 29.175,52.448 29.227,52.455 29.276,52.475 29.318,52.507 29.35,52.549 29.37,52.598 29.377,52.65 29.377,54.573 47.298,54.573 47.298,52.75 47.305,52.698 47.325,52.649 47.357,52.607 47.399,52.575 47.448,52.555 47.5,52.548 49.2,52.548 49.252,52.555 49.301,52.575 49.343,52.607 49.375,52.649 49.395,52.698 49.402,52.75 49.402,54.573 59.49,54.573
GND on Supply (split plane): 33.923,78.727 31.3,78.727 31.248,78.72 31.199,78.7 31.157,78.668 31.125,78.626 31.105,78.577 31.098,78.525 31.098,75.327 0.51,75.327 0.51,79.998 31.3,79.998 31.352,80.005 31.401,80.025 31.443,80.057 31.475,80.099 31.495,80.148 31.502,80.2 31.502,80.698 33.923,80.698
GND on Supply (split plane): 59.49,72.752 44.702,72.752 44.702,82.523 59.49,82.523
GND on Supply (split plane): 35.698,72.752 0.51,72.752 0.51,74.923 31.3,74.923 31.352,74.93 31.401,74.95 31.443,74.982 31.475,75.024 31.495,75.073 31.502,75.125 31.502,78.323 34.125,78.323 34.177,78.33 34.226,78.35 34.268,78.382 34.3,78.424 34.32,78.473 34.327,78.525 34.327,80.9 34.32,80.952 34.3,81.001 34.268,81.043 34.226,81.075 34.177,81.095 34.125,81.102 31.3,81.102 31.248,81.095 31.199,81.075 31.157,81.043 31.125,81.001 31.105,80.952 31.098,80.9 31.098,80.402 0.51,80.402 0.51,82.548 35.698,82.548

## Other copper
Bottom Layer:
  text "j4" at 0,96.25 h2
  text "j5" at 59.925,87.325 h2
  text "j5" at 59.5,87.229 h2
GND (plane layer: these items are gaps in the copper):
  rectangle: 41.425,56.65 43,58.575
  rectangle: 37.025,57.3 38.6,59.225
  rectangle: 21.4,56.65 22.975,58.575
  rectangle: 17,57.3 18.575,59.225
  region: 46.295,56.23 45.295,56.23 45.295,54.255 46.295,54.255
  region: 47.565,61.63 46.565,61.63 46.565,59.655 47.565,59.655
  region: 47.565,56.23 46.565,56.23 46.565,54.255 47.565,54.255
  region: 34.72,61.63 33.72,61.63 33.72,59.655 34.72,59.655
  region: 34.72,56.23 33.72,56.23 33.72,54.255 34.72,54.255
  region: 33.45,56.23 32.45,56.23 32.45,54.255 33.45,54.255
  region: 27.54,56.23 26.54,56.23 26.54,54.255 27.54,54.255
  region: 26.27,56.23 25.27,56.23 25.27,54.255 26.27,54.255
  region: 27.54,61.63 26.54,61.63 26.54,59.655 27.54,59.655
  region: 14.695,56.23 13.695,56.23 13.695,54.255 14.695,54.255
  region: 13.425,56.23 12.425,56.23 12.425,54.255 13.425,54.255
  rectangle: 13.705,59.65 14.705,61.625
  region: 26.145,78.47 26.145,77.47 28.12,77.47 28.12,78.47
  region: 11.845,77.2 11.845,76.2 13.82,76.2 13.82,77.2
  region: 26.145,77.2 26.145,76.2 28.12,76.2 28.12,77.2
  region: 20.745,77.2 20.745,76.2 22.72,76.2 22.72,77.2
  region: 20.745,78.47 20.745,77.47 22.72,77.47 22.72,78.47
  region: 17.245,78.47 17.245,77.47 19.22,77.47 19.22,78.47
  region: 17.245,77.2 17.245,76.2 19.22,76.2 19.22,77.2
  region: 11.845,78.47 11.845,77.47 13.82,77.47 13.82,78.47
Supply (plane layer: these items are gaps in the copper):
  lines w0.4: -0.025,59.875 8.35,59.875 8.35,59.15 10.7,59.15 19.125,59.15 20.825,59.15 39.125,59.15 40.85,59.15 49.275,59.15 51.625,59.15 51.625,59.875 60,59.875 ; 0,54.775 27.475,54.775 27.475,52.65 29.175,52.65 29.175,54.775 47.5,54.775 47.5,52.75 49.2,52.75 49.2,54.775 60,54.775 ; 0,64.905 60,64.905 ; 0,72.55 35.9,72.55 35.9,82.75 0,82.75 ; 0,75.125 30.05,75.125 ; 0,80.2 30.05,80.2 ; 0,90.375 60,90.375 ; 0,95.45 36.325,95.45 ; 0.015,49.7 60.015,49.7 ; 22.875,75.125 31.3,75.125 31.3,78.525 34.125,78.525 34.125,80.9 31.3,80.9 31.3,80.2 30.875,80.2 22.875,80.2 ; 35.1,34.525 29.15,34.525 29.15,36.9 35.075,36.9 35.075,44.525 50.35,44.525 56.5,44.525 ; 42.7,36.875 48.275,36.875 54.75,36.875 54.75,34.45 44,34.45 44,32.5 45.25,32.5 ; 47.8,32.175 54.75,32.175 54.75,34.7 ; 60,72.55 44.5,72.55 44.5,82.725 60,82.725

## Silkscreen, mask and mechanical layers (free items; w line width, h text height)
Top Overlay:
  text "GND" at 21.472,103.675 h1
  text "GND" at 37.011,103.675 h1
  text "GND" at 52.55,103.675 h1
  text "+5" at 34.35,79.225 h1
  text "GND" at 34.35,76.85 h1
  text "-5" at 34.35,74.475 h1
  text "GND" at 40.509,71.086 h1 r90
  text "+5" at 6.475,59.85 h1
  text "+5" at 51.85,59.85 h1
  text "GND" at 30.5,58.15 h1 r90
  text "GND" at 5.475,57.475 h1
  text "GND" at 51.85,57.475 h1
  text "-5" at 6.475,55.1 h1
  text "-5" at 51.85,55.1 h1
  text "GND" at 49.266,39.975 h1
  text "GND" at 26.041,37.6 h1
  text "+1.8A" at 47.6,37.6 h1
  text "+1.8D" at 47.6,35.25 h1
  text "+1.8A" at 24.375,35.225 h1
  text "+3.3" at 48.433,32.85 h1
Bottom Overlay:
  text "j4" at 0.575,92.375 h2
Mechanical 2:
  the board outline again, w0.4
Mechanical 12:
  lines w0.254: 0,140 60,140
  lines w0.4: 0,0 60,0 60,140 0,140 0,0

## Dimensions
0,140 to 60,140 on Mechanical 12
0,140 to 0,0 on Mechanical 12